# EAGLE board shield (EAGLE 9.5.0)
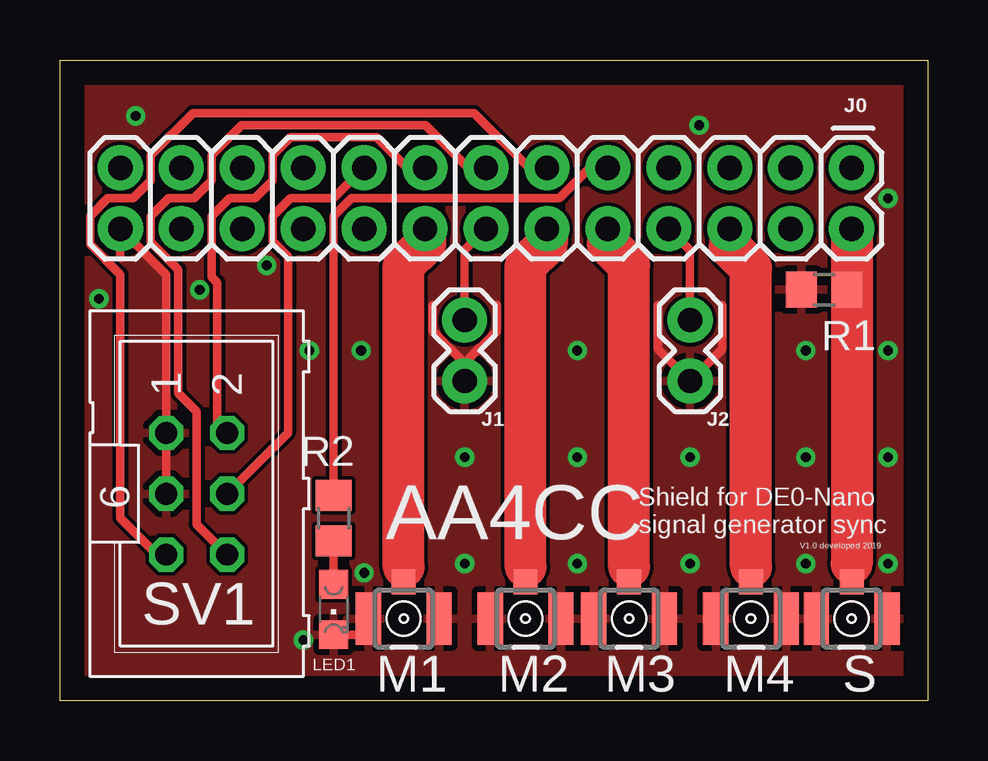
[diagram p0: board, top side]
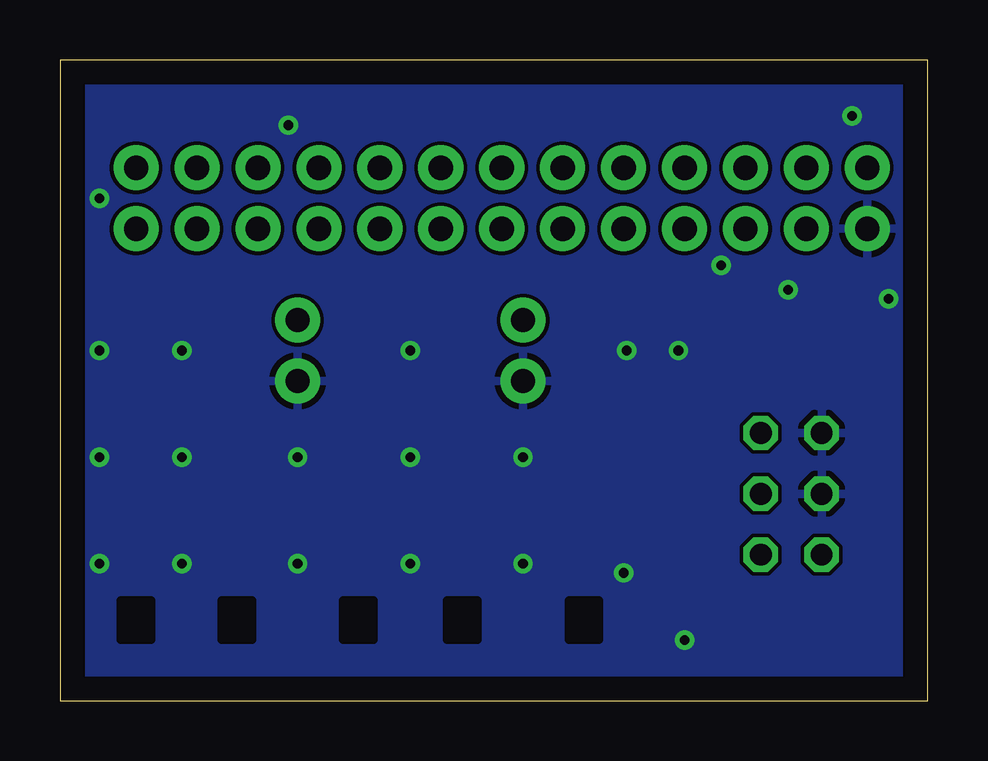
[diagram p1: board, bottom side, seen from below]

Size 36.17 x 26.72 mm. Coordinates in mm from the lower left corner, seen from the top.
Outline: 36.17,0 0,0 0,26.72 36.17,26.72 36.17,0
Copper layers (1*16): Top 0.035mm / dielectric 1mm / Bottom 0.035mm
Design rules "default *": minimum track width 6mil, minimum drill 0.35mm, track to track 6mil, track to pad 6mil, pad to pad 6mil, via to via 6mil, smd to smd 6mil, copper to edge 40mil, drill to drill 6mil, minimum pad ring 10mil, minimum via ring 8mil, stop-mask expansion 4mil, vias tented up to drill 0mil, thermal gap 10mil
tKeepout: area 32.4,2.5 to 33.6,4.2; area 28.2,2.5 to 29.4,4.2; area 23.1,2.5 to 24.4,4.2; area 18.8,2.5 to 20,4.2; area 13.7,2.5 to 15,4.2
tRestrict: area 32.4,2.5 to 33.6,4.2; area 28.2,2.5 to 29.4,4.2; area 23.1,2.5 to 24.4,4.2; area 18.8,2.5 to 20,4.2; area 13.7,2.5 to 15,4.2
bRestrict: area 32.4,2.5 to 33.6,4.2; area 28.2,2.5 to 29.4,4.2; area 23.1,2.5 to 24.4,4.2; area 18.8,2.5 to 20,4.2; area 13.7,2.5 to 15,4.2

## Footprints (pad centres in the part's own frame; a part is rotated, then mirrored left to right if it is on the bottom)
2X13 = drill 1.016 pad 1.88: 1 0,0; 2 0,2.54; 3 2.54,0; 4 2.54,2.54; 5 5.08,0; 6 5.08,2.54; 7 7.62,0; 8 7.62,2.54; 9 10.16,0; 10 10.16,2.54; 11 12.7,0; 12 12.7,2.54; 13 15.24,0; 14 15.24,2.54; 15 17.78,0; 16 17.78,2.54; 17 20.32,0; 18 20.32,2.54; 19 22.86,0; 20 22.86,2.54; 21 25.4,0; 22 25.4,2.54; 23 27.94,0; 24 27.94,2.54; 25 30.48,0; 26 30.48,2.54
1X02 = drill 1.016 pad 1.88: 1 0,0; 2 2.54,0
CHIPLED_0805 = smd 1.2 x 1.2: A 0,-1.05; C 0,1.05
R0805 = smd 1.3 x 1.5: 1 -0.95,0; 2 0.95,0
ML6 = drill 0.914 octagon: 1 -2.54,-1.27; 2 -2.54,1.27; 3 0,-1.27; 4 0,1.27; 5 2.54,-1.27; 6 2.54,1.27
MC-921 = smd 1 x 1.05: 1 0,1.528 | smd 1.05 x 2.2: 2@1 -1.475,0; 2@2 1.475,0

## Placement (x,y rotation side)
J0  [2X13]  33,22.23 180 top
J1  [1X02]  16.87,13.34 90 top
J2  [1X02]  26.27,13.34 90 top
LED1  [CHIPLED_0805]  11.41,3.81 180 top
R1  200  [R0805]  31.86,17.14 0 top
R2  [R0805]  11.41,7.62 90 top
SV1  [ML6]  5.7,8.64 270 top
X_M1  MC-921  [MC-921]  28.81,3.43 0 top
X_M2  MC-921  [MC-921]  23.73,3.43 0 top
X_M3  MC-921  [MC-921]  19.41,3.43 0 top
X_M4  MC-921  [MC-921]  14.33,3.43 0 top
X_S  MC-921  [MC-921]  33,3.43 0 top

## Library data of the parts
J0 J1 J2 = SparkFun-Connectors
LED1 = led
R1 R2 = rcl; SPICEPREFIX: R
SV1 = con-ml; OC_FARNELL: unknown; OC_NEWARK: unknown
X_M1-X_M4 X_S = con-coax; OC_FARNELL: unknown; OC_NEWARK: unknown

## Nets
GND: J0.26 J1.1 J2.1 LED1.C R1.1 SV1.1 SV1.3 X_M1.2@1 X_M1.2@2 X_M2.2@1 X_M2.2@2 X_M3.2@1 X_M3.2@2 X_M4.2@1 X_M4.2@2 X_S.2@1 X_S.2@2
N$1: J0.2 R1.2 X_S.1
N$2: J0.6 X_M1.1
N$3: J0.3
N$4: J0.16 X_M4.1
N$5: J0.10 X_M2.1
N$6: J0.12 X_M3.1
N$7: J0.8 J2.2
N$8: J0.14 J1.2
N$9: J0.17 SV1.4
N$10: J0.15 SV1.2
N$11: J0.13 SV1.6
N$12: J0.11 SV1.5
N$19: LED1.A R2.1
N$20: J0.9 R2.2

## Tracks (layer width: path | path; a pad name or v marks a point on that pad's centre or on a via)
GND  (via drill 0.4)
  Top 0.356: LED1.C 12.65,2.76 12.68,2.79 | 4.43,8.25 4.43,17.78 J0.26 2.52,18.5 2.56,18.46 | 16.87,14.08 18.21,15.42 18.21,16.51 | J1.1 16.87,14.08 | 16.87,14.08 15.53,15.42 15.53,16.51 | 24.93,16.51 24.93,14.67 J2.1 27.61,14.67 27.61,16.51
  other vias: 31.09,14.61 31.09,5.71 26.27,5.71 21.57,5.71 21.57,14.61 16.87,5.71 12.55,14.61 31.09,10.16 26.27,10.16 21.57,10.16 16.87,10.16 34.52,14.61 34.52,5.71 34.52,10.16 10.14,2.54 5.82,17.14 8.62,18.16 10.39,14.61 12.68,5.33 34.52,20.95 26.65,24 3.15,24.38 1.63,16.76
  pour Top: -0.02,0 -0.02,26.67 36.17,26.67 36.17,0
  pour Bottom: -0.02,26.67 -0.02,0 36.17,0 36.17,26.67
N$1
  Top 0.254: 33,5.71 X_S.1 | R1.2 33,17.34 J0.2
  Top 1.742: J0.2 33,5.71
N$2
  Top 0.254: X_M1.1 28.81,5.59
  Top 1.742: J0.6 27.92,18.92 28.81,18.03 28.81,5.59
N$4
  Top 0.254: X_M4.1 14.33,5.59
  Top 1.742: J0.16 15.22,19.05 14.33,18.16 14.33,5.59
N$5
  Top 0.254: X_M2.1 23.73,5.59
  Top 1.742: J0.10 22.84,19.05 23.73,18.16 23.73,5.59
N$6
  Top 0.254: X_M3.1 19.41,5.59
  Top 1.742: J0.12 20.3,19.05 19.41,18.16 19.41,5.59
N$7
  Top 0.356: J0.8 26.27,18.8 J2.2
N$8
  Top 0.356: J0.14 16.87,18.8 J1.2
N$9
  Top 0.356: J0.17 11.41,20.95 9.61,20.95 8.87,20.21 8.87,19.16 9.5,18.52 9.5,11.18 SV1.4
N$10
  Top 0.356: J0.15 14.48,22.23 13.21,23.49 9.61,23.49 8.87,22.75 8.87,21.7 8.13,20.95 7.07,20.95 6.33,20.21 6.33,17.67 6.55,17.45 6.55,11.59 SV1.2
N$11
  Top 0.356: J0.13 17.02,22.23 15.24,24 7.58,24 6.33,22.75 6.33,21.7 5.59,20.95 4.53,20.95 3.79,20.21 3.79,19.13 4.93,17.99 4.93,12.83 5.7,12.07 5.7,7.37 SV1.6
N$12
  Top 0.356: J0.11 19.56,22.23 17.27,24.51 5.55,24.51 3.79,22.75 3.79,21.7 3.05,20.95 1.99,20.95 1.25,20.21 1.25,19.05 2.52,17.78 2.52,7.62 4.04,6.1 SV1.5
N$19
  Top 0.356: R2.1 LED1.A
N$20
  Top 0.356: J0.9 22.1,22.23 20.83,20.95 12.15,20.95 11.41,20.21 R2.2

## Text on the board
tPlace: AA4CC | Shield for DE0-Nano / signal generator sync | V1.0 developed 2019 | M1 | M2 | M3 | M4 | S